# Altium PCB fire_warning_system.PcbDoc
Units mil, origin at the board's own origin, x right, y up, seen from the top; angles counter-clockwise.
Board outline 3368.75 x 2870 mil, 2 copper layers (Top Layer, Bottom Layer); 27 components, 21 nets, 96 pads, 0 vias.
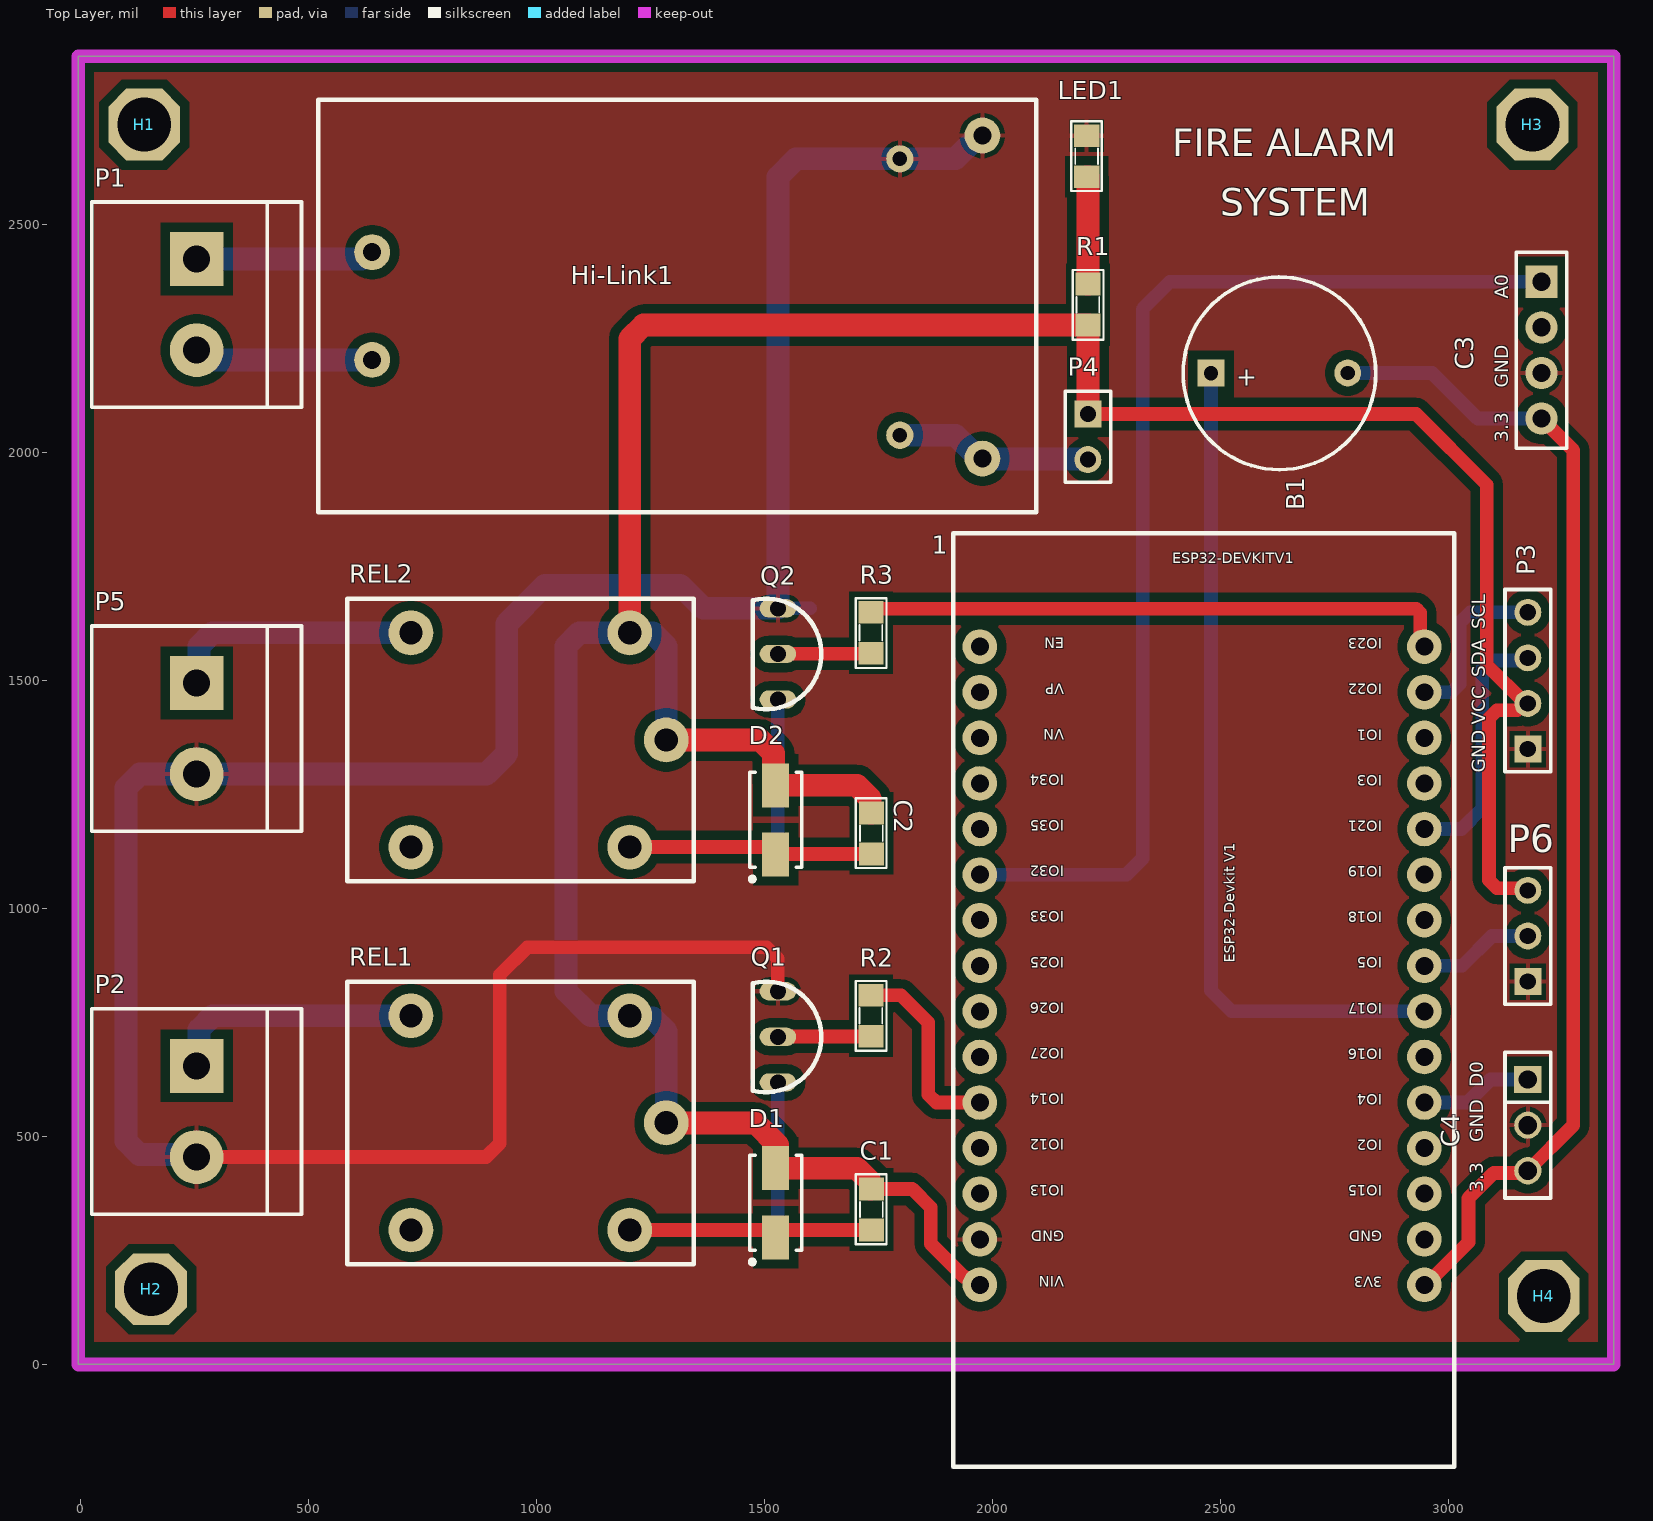
[diagram p0: Top Layer view]
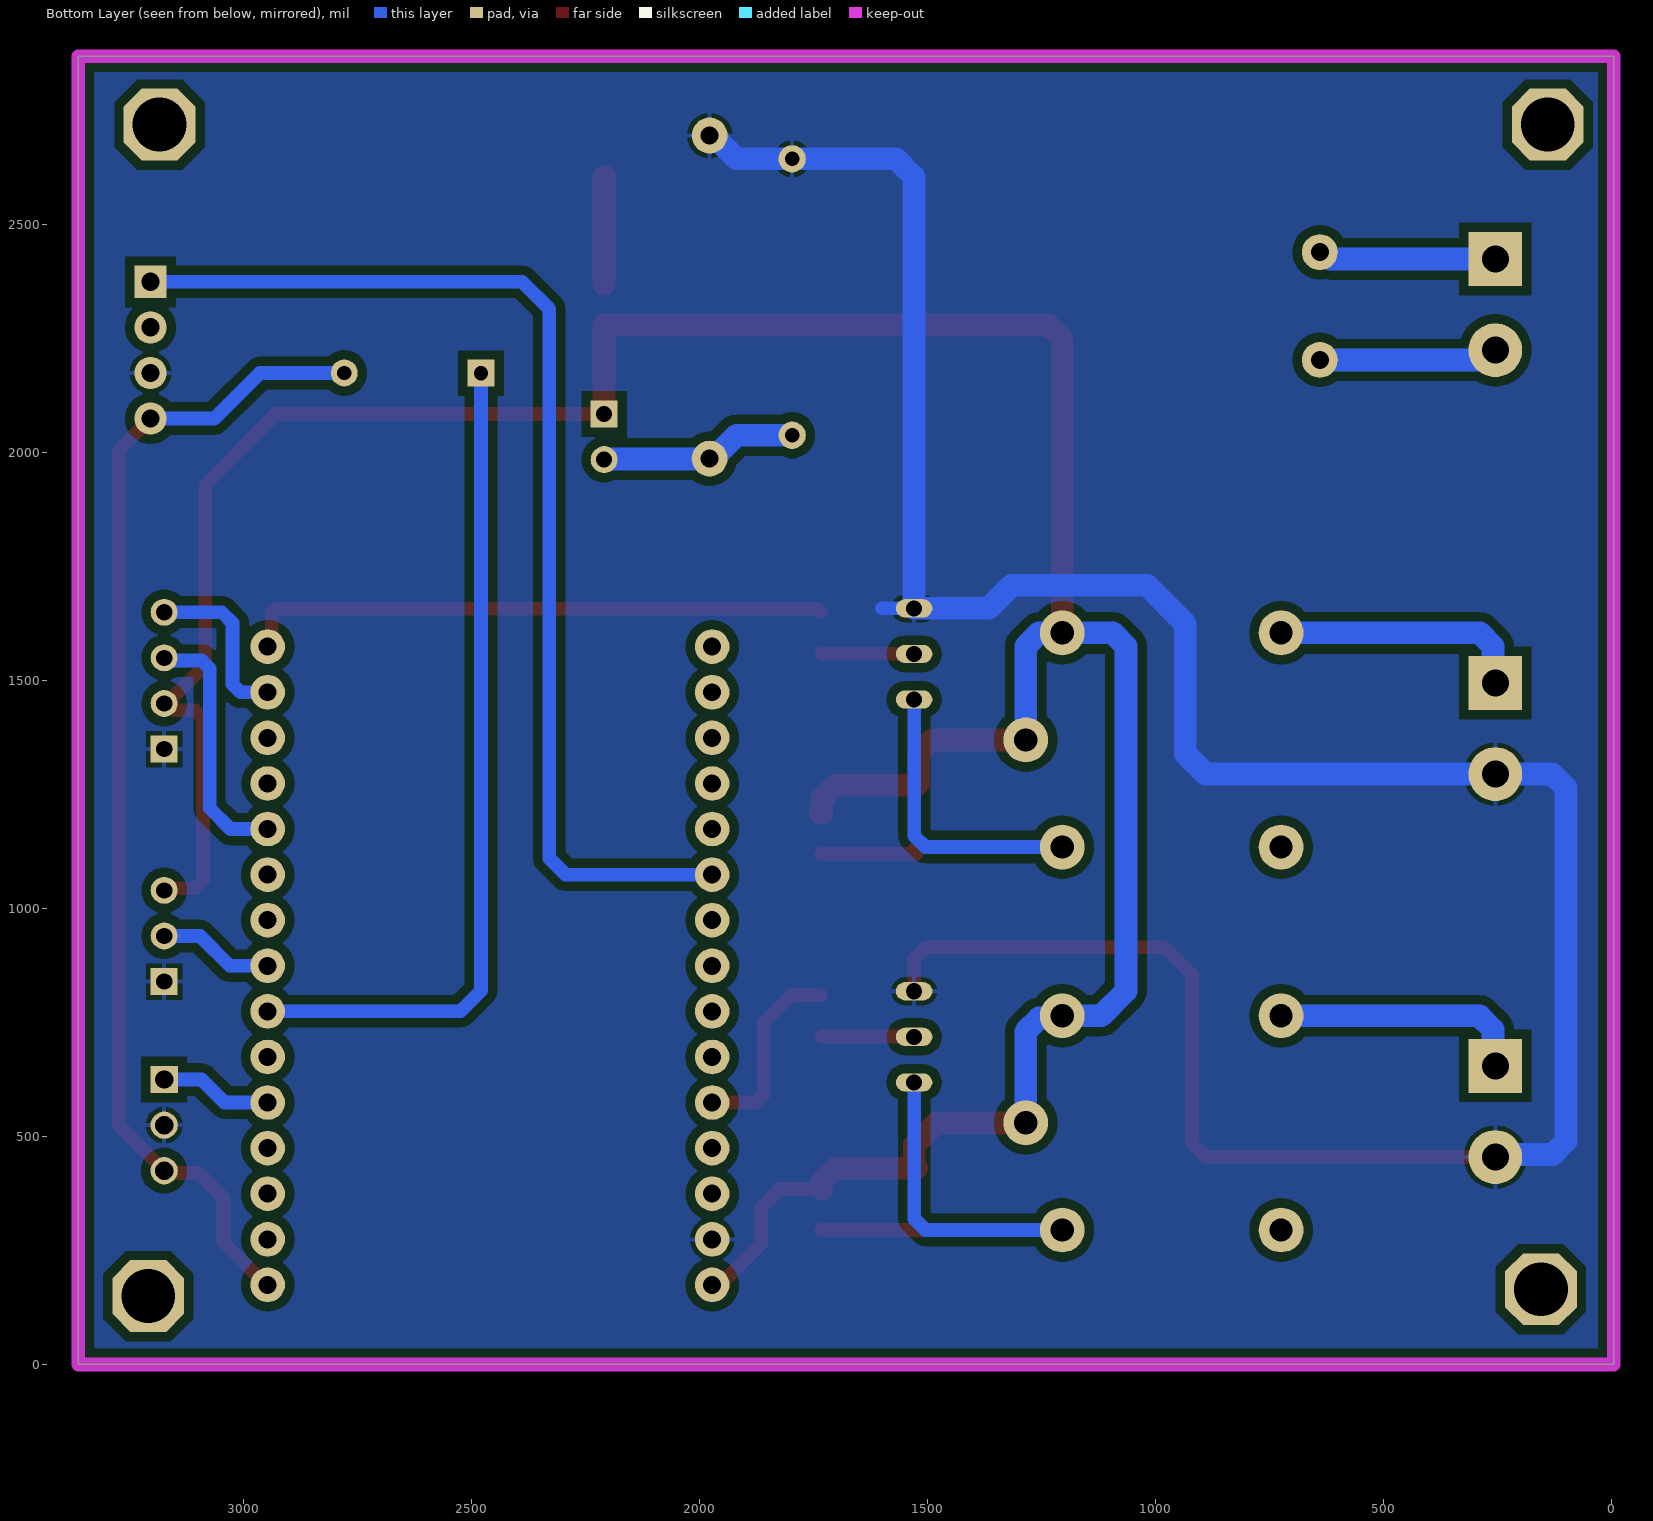
[diagram p1: Bottom Layer view, seen from below]
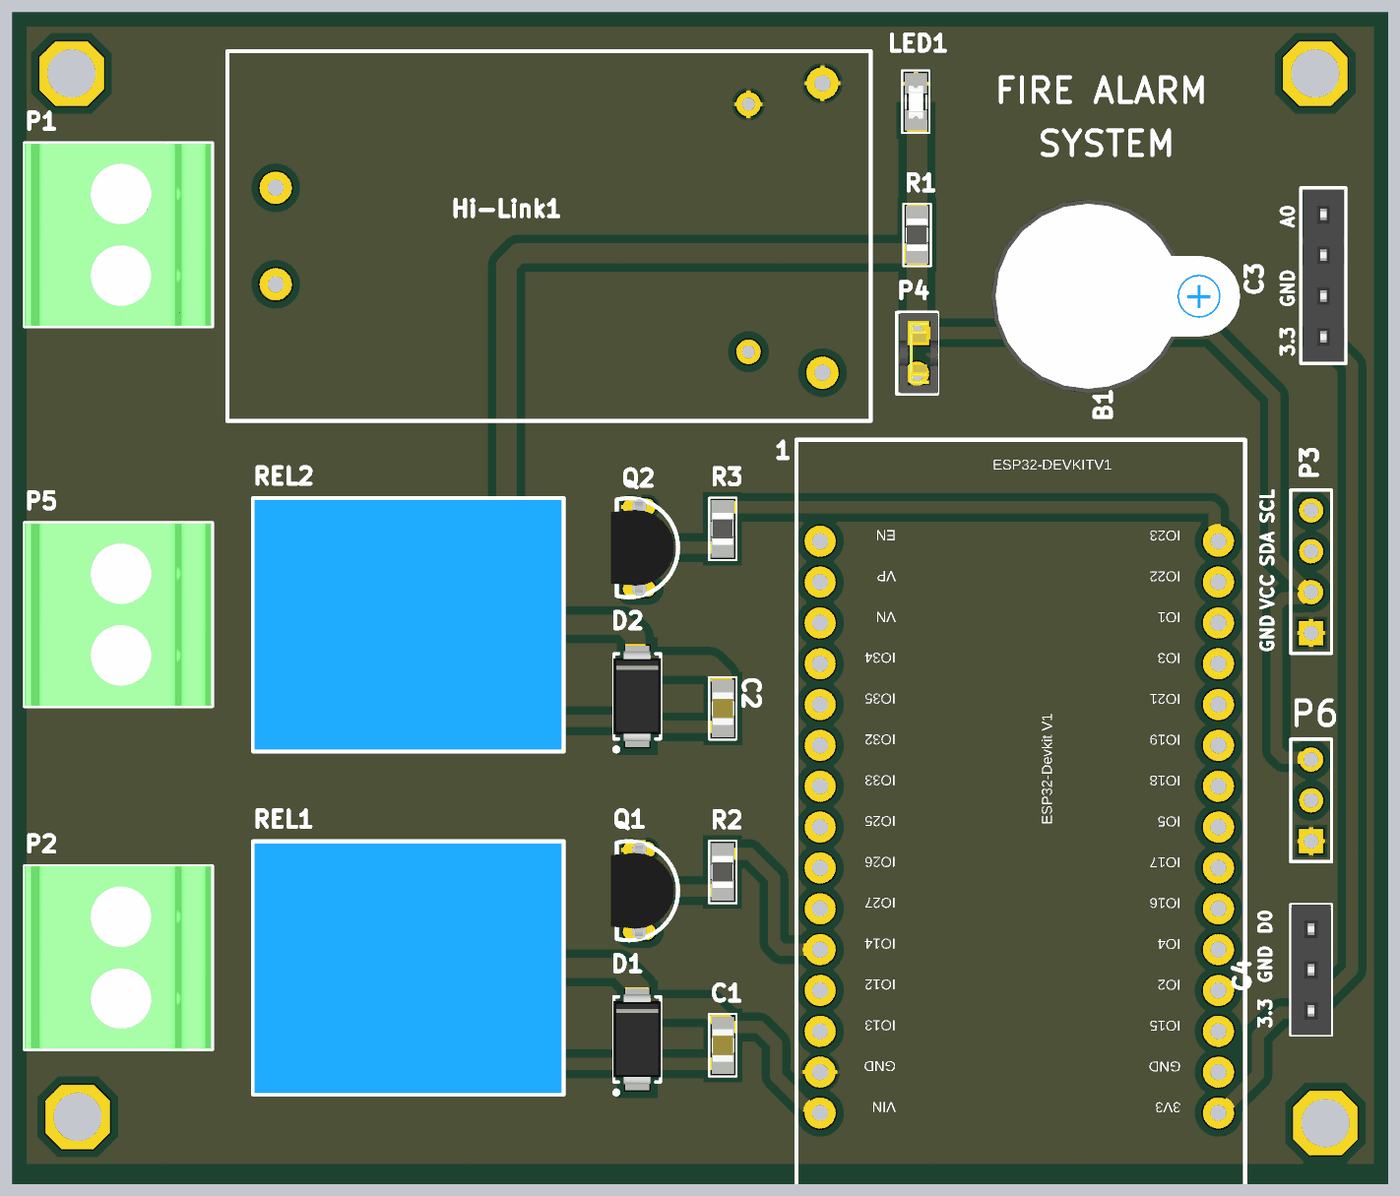
[diagram p2: 3D render of the assembled board from above, using the file's embedded part models]

## Layer stack, top to bottom
Top Solder: solder mask 0.4, Solder Resist, Dk 3.5
Top Layer: signal copper 1.4
Dielectric 1: dielectric 12.6, FR-4, Dk 4.8
Bottom Layer: signal copper 1.4
Bottom Solder: solder mask 0.4, Solder Resist, Dk 3.5

## Board outline
-5,0 -5,2870 3363.75,2870 3363.75,0

## Design rules (kind name [scope] priority, off if disabled: settings)
Clearance [All] p1: gap=20 ignorepadtopadclearanceinfootprint=FALSE
PolygonConnect [All] p1: connectstyle=Relief reliefconductorwidth=10 reliefentries=4 polygonreliefangle="90 Angle" airgapwidth=10
RoutingVias [All] p1: holewidth=20 width=30 viastyle="Through Hole" minholewidth=20 minwidth=30 maxholewidth=20 maxwidth=30
SolderMaskExpansion [All] p1: expansion=4 istentingtop=FALSE
Width [All] p1: maxlimit=50 minlimit=20 preferedwidth=30
30 further rules are at their usual default settings.

## Components (designator, comment, footprint, x,y, rotation, side; value= is the part's Value field where it differs from the comment)
1 "ESP32DEVKITV1" ESP32-DEVKITV1 2415,1075 r90 top
B1 "BUZZER" SPEAKER 2480,2174.5 r0 top
C1 "104" "0805 CAP" 1735,340 r270 top
C2 "104" "0805 CAP" 1735,1165 r270 top
C3 "MQ2-MOD" MQ2-MODULE 3205,2225 r270 top
C4 "Hồng ngoại" JP3-C1T 3175,625 r270 top
D1 "DIODE" "DIODE SMA" 1525,354.76 r90 top
D2 "DIODE" "DIODE SMA" 1525,1194.76 r90 top
H1 "HOLE" HOLE 140,2720 r0 top
H2 "HOLE" HOLE 155,165 r0 top
H3 "HOLE" HOLE 3185,2720 r0 top
H4 "HOLE" HOLE 3210,150 r0 top
Hi-Link1 "Component_1" 5/12V-3W 640,2440 r0 top
LED1 "LED" "LED SMD 0805" 2210,2650 r270 top value="LED 3 ly Single Colour"
P1 "Header 2H" "CON 2KF 5.08MM" 255,2425 r270 top
P2 "DEVICE 1" "CON 2KF 5.08MM" 255,655 r270 top
P3 "LCD I2C" HDR1X4 3175,1350 r90 top
P4 "JP2" "JUMPER PITCH 2 PIN" 2210,2085 r270 top
P5 "DEVICE 1" "CON 2KF 5.08MM" 255,1495 r270 top
P6 "Header 3H" HDR1X3 3175,840 r90 top
Q1 "N-MOSFET SOT23" "TO-92 - 2N7000" 1530,718.72 r270 top
Q2 "N-MOSFET SOT23" "TO-92 - 2N7000" 1530,1558.72 r270 top
R1 "1K" "0805 RESISTOR" 2210,2325 r90 top value="R1/4W - 1K"
R2 "100k" "0805 RESISTOR" 1734,765 r90 top value="R1/4W - 1K"
R3 "100k" "0805 RESISTOR" 1734,1605 r90 top value="R1/4W - 1K"
REL1 "RELAY 5V 10A" "RELAY 5V-10A" 1285,530 r90 top
REL2 "RELAY 5V 10A" "RELAY 5V-10A" 1285,1370 r90 top

## Footprints (in the part's own frame and the unit in brackets; to place one, negate y for a bottom-side part, rotate by r counter-clockwise, add the part's x,y. Pads: shape width x height; smd on the part's side, far side on the other; paste and mask are expansions set on the pad)
5/12V-3W [mm]
  round 2 hole 1: 1(0,0) 2(0,-6) 3(34,6.5) 4(34,-11.5)
  round 1.524 hole 0.8: 3(29.4,5.2) 4(29.4,-10.2)
  silkscreen extent -3,-14.5 37,8.5
"0805 CAP" [mil] "Compoment SMD 80x50mil"
  rect 50x55 smd: 1(-45,0) 2(45,0)
  silkscreen extent -77,-34 76,33, body extent -40,-25 40,25, height 24
"0805 RESISTOR" [mil] "Compoment SMD 80x50mil"
  rect 50x55 smd: 1(-45,0) 2(45,0)
  silkscreen extent -77,-34 76,33, body extent -39,-25 39,25, height 24
"CON 2KF 5.08MM" [mm] "Connector; Header; 2 Position"
  rect 3x3 hole 1.5: 1(0,0)
  round 3 hole 1.5: 2(5.08,0)
  silkscreen extent -3.18,-5.84 8.26,5.84, body extent -3.13,-5.84 8.21,5.78, height 18
"DIODE SMA" [mm]
  rect 2.45x1.5 smd: 1(-1.925,0) 2(1.925,0)
  silkscreen extent -3.42,-1.45 2.65,1.45, body extent -2.8,-1.48 2.8,1.47, height 2.7
ESP32-DEVKITV1 [mil]
  round 76 hole 39.37: 1(-900.39,-533.07) 2(-800.39,-533.07) 3(-700.39,-533.07) 4(-600.39,-533.07) 5(-500.39,-533.07) 6(-400.39,-533.07) 7(-300.39,-533.07) 8(-200.39,-533.07) 9(-100.39,-533.07) 10(-0.39,-533.07) 11(99.61,-533.07) 12(199.61,-533.07) 13(299.61,-533.07) 14(399.61,-533.07) 15(499.61,-533.07) 16(499.61,442.13) 17(399.61,442.13) 18(299.61,442.13) 19(199.61,442.13) 20(99.61,442.13) 21(-0.39,442.13) 22(-100.39,442.13) 23(-200.39,442.13) 24(-300.39,442.13) 25(-400.39,442.13) 26(-500.39,442.13) 27(-600.39,442.13) 28(-700.39,442.13) 29(-800.39,442.13) 30(-900.39,442.13)
  silkscreen extent -1299,-598 748,500
HDR1X3 [mm] "Connector; Header; 3 Position"
  rect 1.5x1.5 hole 0.9: 1(0,0)
  round 1.5 hole 0.9: 2(2.54,0) 3(5.08,0)
  silkscreen extent -1.27,-1.27 6.35,1.27
HDR1X4 [mm] "Connector; Header; 4 Position"
  rect 1.5x1.5 hole 0.9: 1(0,0)
  round 1.5 hole 0.9: 2(2.54,0) 3(5.08,0) 4(7.62,0)
  silkscreen extent -1.27,-1.27 8.89,1.27, body extent -1.27,-1.27 8.89,1.27, height 7
HOLE [mm]
  oct 4x4 hole 3: H(0,0)
JP3-C1T [mm] "3 row, straight, gold plating"
  rect 1.52x1.52 hole 1.02: 1(0,0)
  round 1.52 hole 1.02: 2(2.54,0) 3(5.08,0)
  silkscreen extent -1.52,-1.27 6.6,1.27, body extent -1.52,-1.25 6.6,1.25, height 8.51
"JUMPER PITCH 2 PIN" [mm] "Connector; Header; 2 Position"
  rect 1.5x1.5 hole 0.9: 1(0,0)
  round 1.5 hole 0.9: 2(2.54,0)
  silkscreen extent -1.27,-1.27 3.81,1.27, body extent -1.27,-1.27 3.81,1.33, height 7.6
"LED SMD 0805" [mil] "Compoment SMD 80x50mil"
  rect 50x55 smd: 1(-45.39,-2.58) 2(44.61,-2.58)
  silkscreen extent -77,-37 76,30, body extent -41,-21 41,15, height 33
MQ2-MODULE [mm]
  rect 1.8x1.8 hole 1.02: 1(-3.81,0)
  round 1.8 hole 1.02: 2(-1.27,0) 3(1.27,0) 4(3.81,0)
  silkscreen extent -5.46,-1.4 5.46,1.4, body extent -10,-1.25 10,21.46, height 38
"RELAY 5V-10A" [mm]
  round 2.5 hole 1.3: 1(0,0) 2(-5.969,14.224) 3(5.969,14.224) 4(-5.969,2.032) 5(5.969,2.032)
  silkscreen extent -7.87,-1.52 7.87,17.78, body extent -7.75,-1.4 7.75,17.7, height 15.3
SPEAKER [mm]
  rect 1.5x1.5 hole 0.8: 1(0,0)
  round 1.5 hole 0.8: 2(7.62,0.013)
  silkscreen extent -1.55,-5.38 9.18,5.36, body extent -2.22,-6 13.24,6, height 4.5
"TO-92 - 2N7000" [mil] "TO, Flat Index; 3 In-Line, Axial Leads; Body Dia. 4.8mm"
  oval 40x80 hole 35.43: 1(0,0) 2(-100,0) 3(100,0)
  silkscreen extent -121,-55 121,95, body extent -110,-70 110,85, height 402

## Part data
C1 C2: library part "CAP CERAMIC", LatestRevisionDate=17-Jul-2002, LatestRevisionNote="Re-released for DXP Platform.", PackageReference=RAD-0.3, Published=8-Jun-2000, Publisher="Altium Limited"
C3: Manufacturer="W¨¹rth Elektronik eiSos GmbH", partNo=613004143121, ComponentLink1 Description=Manufacturer, ComponentLink1URL=http://www.we-online.com, ComponentLink2 Description=Datasheet, ComponentLink2URL=http://katalog.we-online.de/em/datasheet/6130xx143121.pdf, Created by="Karrer Zheng", Created Date="29 March 2013", NoPins=04
C4: library part Header3, "Header IDC, 3 x 1 Pin Vertical 2.54mm Pitch (Non-Boxed, Male)", Manufacturer="W¨¹rth Elektronik eiSos GmbH", partNo=613002143121, ComponentLink1 Description=Manufacturer, ComponentLink1URL=http://www.we-online.com, ComponentLink2 Description=Datasheet, ComponentLink2URL=http://katalog.we-online.de/em/datasheet/6130xx143121.pdf, Created by="Karrer Zheng", Created Date="29 March 2013", NoPins=02
LED1: "LED Single colour Green and Red"
P2 P5: library part "Header 2H", LatestRevisionDate=17-Jul-2002, LatestRevisionNote="Re-released for DXP Platform.", Publisher="Altium Limited"
P3: library part "Header 4H", LatestRevisionDate=17-Jul-2002, LatestRevisionNote="Re-released for DXP Platform.", Publisher="Altium Limited"
P4: "WR-PHD 2.54 mm Angled Socket Header", Manufacturer="W¨¹rth Elektronik eiSos GmbH", partNo=613002143121, ComponentLink1 Description=Manufacturer, ComponentLink1URL=http://www.we-online.com, ComponentLink2 Description=Datasheet, ComponentLink2URL=http://katalog.we-online.de/em/datasheet/6130xx143121.pdf, Created by="Karrer Zheng", Created Date="29 March 2013", NoPins=02
R1 R2 R3: library part RESISTOR
P1 P6: LatestRevisionDate=17-Jul-2002, LatestRevisionNote="Re-released for DXP Platform.", Publisher="Altium Limited"

## Nets (pads, with @x,y where several pads share a name; then routed paths per layer and width w, separated by ;. In a path a pad name is that pad's centre, name@x,y a point inside that pad or via, vN(x,y) a via of type N, cw(c..) or ccw(c..) an arc to the next point about the centre after c; other vN are vias at no path point)
3.3V: 1.1 B1.2 C3.4 C4.3 | length 2574.1
  Top Layer w30: 1.1 2951.31,174.61 3045,268.3 3045,365 3100.08,420.08 3170.08,420.08 C4.3 3275,525 3275,2005 C3.4
  Bottom Layer w30: B1.2 2965,2175 3065,2075 C3.4
+220V: Hi-Link1.1 P1.1 | length 391.2
  Bottom Layer w50: P1.1 617.22,2425 632.22,2440 Hi-Link1.1
-220V: Hi-Link1.2 P1.2 | length 393.8
  Bottom Layer w50: P1.2 273.43,2225 294.65,2203.78 Hi-Link1.2
A0: 1.21 C3.1 | length 2476.6
  Bottom Layer w30: 1.21 2294.61,1074.61 2330,1110 2330,2315 2390,2375 C3.1
Buzz: 1.7 B1.1 | length 1841.4
  Bottom Layer w30: B1.1 2480,820 2525.39,774.61 1.7
D0: 1.5 C4.1 | length 247.8
  Bottom Layer w30: 1.5 3042.56,574.61 3092.95,625 C4.1
D1: 1.8 P6.2 | length 254
  Bottom Layer w30: 1.8 3031.13,874.61 3096.52,940 P6.2
DV1: 1.26 R2.2 | length 428.8
  Top Layer w30: R2.2 1800,810 1860,750 1860,592.18 1877.57,574.61 1.26
DV2: 1.15 R3.2 | length 1289.9
  Top Layer w30: R3.2 1741.61,1657.61 2930.5,1657.61 2939.27,1648.84 2939.27,1583.41 1.15
GND: 1.29 C3.3 C4.2 Hi-Link1.3 LED1.1 P2.2 P3.1 P5.2 P6.1 Q1.2 Q2.2 | length 6014.8
  Top Layer w30: P2.2 890,455 920,485 920,855 980,915 1505,915 1530,890 Q1.2
  Top Layer w50: Hi-Link1.3@1978.58,2695.91 Hi-Link1.3@1979.09,2695.39
  Bottom Layer w30: Q2.2 1601.28,1658.72
  Bottom Layer w50: P2.2 249.29,460.71 129.29,460.71 100,490 100,1265 130,1295 P5.2 890,1295 935,1340 935,1625 1019.21,1709.21 1315.67,1709.21 1366.16,1658.72 Q2.2 1530,2605 1569.72,2644.72 1797.48,2644.72 1919.62,2644.72 1970.81,2695.91 Hi-Link1.3@1978.58,2695.91
JP1: P2.1 REL1.3 | length 563.6
  Bottom Layer w50: P2.1 265,665 260,670 260,735 290,765 REL1.3
JP2: P5.1 REL2.3 | length 559.9
  Bottom Layer w50: P5.1 260,1500 260,1575.71 289.29,1605 REL2.3
NetC1_2: C1.2 D1.1 Q1.3 REL1.4 | length 1172
  Top Layer w30: REL1.4 1529.21,295 1530,294.21 1530.79,295 C1.2
  Bottom Layer w30: REL1.4 1505,295 1530,320 1530,614.1 1525,614.1 1529.62,618.72 Q1.3
NetC2_2: C2.2 D2.1 Q2.3 REL2.4 | length 1170.8
  Top Layer w30: REL2.4 1524.21,1135 D2.1@1529.21,1130 ; D2.1 1526.02,1120 C2.2
  Bottom Layer w30: REL2.4 1505,1135 1530,1160 Q2.3
NetHi-Link1_4: Hi-Link1.4 P4.2 | length 434.6
  Bottom Layer w50: Hi-Link1.4@1797.48,2038.43 1919.62,2038.43 1970.81,1987.24 1978.58,1987.24 1979.7,1986.12 2208.88,1986.12 P4.2
NetLED1_2: LED1.2 R1.2 | length 237.9
  Top Layer w50: LED1.2 2209.92,2605.39 2210,2605.32 R1.2
NetQ1_1: Q1.1 R2.1 | length 204.5
  Top Layer w30: Q1.1 1530.64,719.36 1733.36,719.36 R2.1
NetQ2_1: Q2.1 R3.1 | length 204.5
  Top Layer w30: Q2.1 1530.64,1559.36 1733.36,1559.36 R3.1
SCL_LCD: 1.14 P3.4 | length 378.2
  Bottom Layer w30: 1.14 3007.43,1474.61 3025,1492.18 3025,1626.36 3048.64,1650 P3.4
SDA_LCD: 1.11 P3.3 | length 580
  Top Layer w30: 1.11 1.11@2960.52,1174.61 ; P3.3@3169.6,1550 P3.3
  Bottom Layer w30: 1.11 3029.61,1174.61 3075,1220 3075,1526.87 3092.57,1544.44 3169.44,1544.44 P3.3
VCC: 1.30 C1.1 C2.1 D1.2 D2.2 P3.2 P4.1 P6.3 R1.1 REL1.1 REL1.5 REL2.1 REL2.5 | length 7023.9
  Top Layer w30: C1.1@1732.5,385 C1.1 1825,385 1865,345 1865,265.1 1938.49,191.61 1943.42,191.61 1960.42,174.61 1.30 ; P4.1 2930,2085 3085,1930 3085,1534.6 P3.2@3169.6,1450 ; P6.3 3170.47,1044.53 3107.57,1044.53 3090,1062.1 3090,1417.43 3107.57,1435 3152.14,1435 3167.14,1450 P3.2
  Top Layer w50: REL2.5 1205,2250 1235,2280 R1.1 P4.1 ; REL1.1 1480.71,530 1529.53,481.18 1529.53,435.08 D1.2 1703.21,430.55 1732.5,401.26 C1.1@1732.5,385 ; REL2.1 1491.18,1370 1520.47,1340.71 1520.47,1275.08 D2.2 1703.21,1270.55 1732.5,1241.26 1732.5,1210 C2.1
  Bottom Layer w50: REL1.1 1285,730.71 1255.71,760 1210,760 REL1.5 1119.29,765 1065,819.29 1065,1575.71 1094.29,1605 REL2.5 1255.71,1605 1285,1575.71 REL2.1
pads on no net: 1.2 1.3 1.4 1.6 1.9 1.10 1.12 1.13 1.16 1.17 1.18 1.19 1.20 1.22 1.23 1.24 1.25 1.27 1.28 C3.2 H1.H H2.H H3.H H4.H REL1.2 REL2.2

## Polygon pours and split planes (outlines as drawn)
GND on Bottom Layer "GND_L02_P000" (solid, pour order 0): 20,2855 3330,2855 3330,40 3310,20 0,20 0,2835 15,2850
GND on Top Layer "GND_L01_P001" (solid, pour order 1): 0,2860 3335,2860 3340,2865 3350,2855 3350,50 25,50 0,25 0,2865

## Keep-outs
Keep-Out Layer:
  the board outline again, w30

## Silkscreen, mask and mechanical layers (free items; w line width, h text height)
Top Overlay:
  text "FIRE ALARM" at 2395,2650 h60
  text "SYSTEM" at 2500,2520 h60
  text "A0" at 3132,2338 h30 r90
  text "GND" at 3132,2143 h30 r90
  text "3.3" at 3132,2023 h30 r90
  text "SCL" at 3082,1613 h30 r90
  text "SDA" at 3082,1508 h30 r90
  text "VCC" at 3082,1403 h30 r90
  text "GND" at 3082,1298 h30 r90
  text "D0" at 3077,608 h30 r90
  text "GND" at 3077,488 h30 r90
  text "3.3" at 3077,378 h30 r90

## Text inside footprints (layer, text, board x,y; h text height)
1: Top Overlay "3V3" at 2855.94,200.59 h40 r180; Top Overlay "GND" at 2855.94,300.59 h40 r180; Top Overlay "IO15" at 2855.94,400.59 h40 r180; Top Overlay "IO2" at 2855.94,500.59 h40 r180; Top Overlay "IO4" at 2855.94,600.59 h40 r180; Top Overlay "IO16" at 2855.94,700.59 h40 r180; Top Overlay "IO17" at 2855.94,800.59 h40 r180; Top Overlay "IO5" at 2855.94,900.59 h40 r180; Top Overlay "IO18" at 2855.94,1000.59 h40 r180; Top Overlay "IO19" at 2855.94,1100.59 h40 r180; Top Overlay "IO21" at 2855.94,1200.59 h40 r180; Top Overlay "IO3" at 2855.94,1300.59 h40 r180; Top Overlay "IO1" at 2855.94,1400.59 h40 r180; Top Overlay "IO22" at 2855.94,1500.59 h40 r180; Top Overlay "IO23" at 2855.94,1600.59 h40 r180; Top Overlay "VIN" at 2158.31,201.38 h40 r180; Top Overlay "GND" at 2158.31,301.38 h40 r180; Top Overlay "IO13" at 2158.31,401.38 h40 r180; Top Overlay "IO12" at 2158.31,501.38 h40 r180; Top Overlay "IO14" at 2158.31,601.38 h40 r180; Top Overlay "IO27" at 2158.31,701.38 h40 r180; Top Overlay "IO26" at 2158.31,801.38 h40 r180; Top Overlay "IO25" at 2158.31,901.38 h40 r180; Top Overlay "IO33" at 2158.31,1001.38 h40 r180; Top Overlay "IO32" at 2158.31,1101.38 h40 r180; Top Overlay "IO35" at 2158.31,1201.38 h40 r180; Top Overlay "IO34" at 2158.31,1301.38 h40 r180; Top Overlay "VN" at 2158.31,1401.38 h40 r180; Top Overlay "VP" at 2158.31,1501.38 h40 r180; Top Overlay "EN" at 2158.31,1601.38 h40 r180; Top Overlay "ESP32-Devkit V1" at 2540.2,880.91 h40 r90; Top Overlay "ESP32-DEVKITV1" at 2395,1750 h40
B1: Top Overlay "+" at 2535.5,2146.5 h40